# Altium PCB Phoenix ME MAX 22.5 SF G 2-2 KMGY.PcbDoc
Units mil, origin at the board's own origin, x right, y up, seen from the top; angles counter-clockwise.
Board outline 2881.89 x 2169.29 mil, 2 copper layers (Top Layer, Bottom Layer); 10 components, 0 nets, 42 pads, 0 vias.
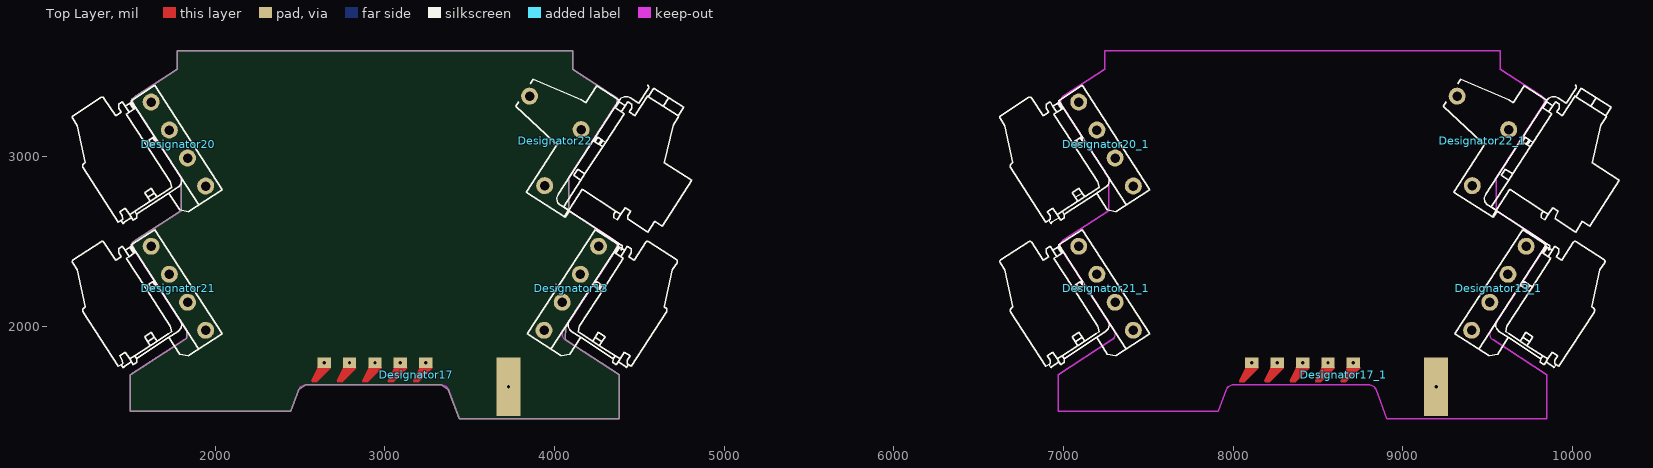
[diagram p0: Top Layer view]
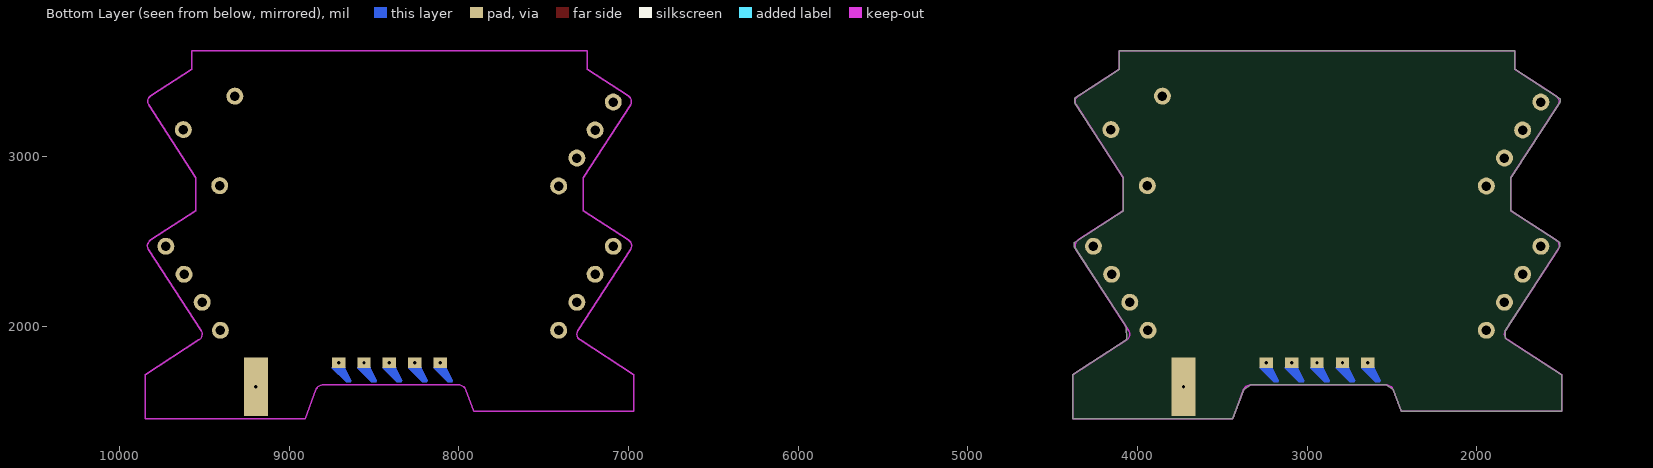
[diagram p1: Bottom Layer view, seen from below]

## Layer stack, top to bottom
Top Layer: signal copper 1.4
Dielectric: dielectric 12.6, FR-4, Dk 4.8
Bottom Layer: signal copper 1.4

## Board outline
2534.62,1655.51 2491.54,1626.77 2445.28,1500 1500,1500 1500,1714.49 1830.71,1929.13 1831.34,1974.41 1511.81,2468.5 1511.81,2496.06 1798.64,2681.98 1799.1,2875.91 1507.87,3322.83 1507.87,3342.52 1775.48,3515.91 1775.59,3625.98 4106.3,3625.98 4106.41,3515.91 4370.08,3345.07 4370.08,3316.79 4082.79,2875.91 4083.25,2681.98 4372.05,2495.08 4372.06,2469.51 4064.85,1997.3 4064.8,1920.38 4381.84,1714.49 4381.89,1456.69 3438.98,1456.69 3374.86,1626.86 3331.79,1655.51

## Design rules (kind name [scope] priority, off if disabled: settings)
Clearance [All] p1: gap=10
PolygonConnect [All] p1: connectstyle=Relief reliefconductorwidth=10 reliefentries=4 polygonreliefangle="90 Angle"
RoutingVias [All] p1: holewidth=28 width=50 viastyle="Through Hole" minholewidth=28 minwidth=50 maxholewidth=28 maxwidth=50
SilkscreenOverComponentPads [All] p1: minsilkscreentomaskgap=10
SolderMaskExpansion [All] p1: expansion=4
Width [All] p1: maxlimit=100 minlimit=6 preferedwidth=10
27 further rules are at their usual default settings.

## Components (designator, comment, footprint, x,y, rotation, side; value= is the part's Value field where it differs from the comment)
Designator13 "Comment" "MKDSO 2.5/4-R" 4099.02,2224.8 r327 top locked
Designator13_1 "Comment" "MKDSO 2.5/4-R" 9567.53,2224.8 r327 top locked
Designator17 "Comment" "ME22.5 TBUS1.5/5" 2941.71,1655.51 r0 top locked
Designator17_1 "Comment" "ME22.5 TBUS1.5/5" 8410.21,1655.51 r0 top locked
Designator20 "Comment" "MKDSO 2.5/4-L" 1782.87,3075.2 r33 top locked
Designator20_1 "Comment" "MKDSO 2.5/4-L" 7251.37,3075.2 r33 top locked
Designator21 "Comment" "MKDSO 2.5/4-L" 1782.87,2224.8 r33 top locked
Designator21_1 "Comment" "MKDSO 2.5/4-L" 7251.37,2224.8 r33 top locked
Designator22 "Comment" "MKDSO2.5 HV/3R-7.5" 4156.69,3159.84 r327 top locked
Designator22_1 "Comment" "MKDSO2.5 HV/3R-7.5" 9625.2,3159.84 r327 top locked

## Footprints (in the part's own frame and the unit in brackets; to place one, negate y for a bottom-side part, rotate by r counter-clockwise, add the part's x,y. Pads: shape width x height; smd on the part's side, far side on the other; paste and mask are expansions set on the pad)
"ME22.5 TBUS1.5/5" [mm]
  rect 2x1.6 hole 0.5: 1(-7.62,3.3) 2(-3.81,3.3) 3(0,3.3) 4(3.8,3.3) 5(7.6,3.3)
  rect 3.6x8.8 hole 0.5: 6(20,-0.3)
  Top Layer region: 1,2.6 1,2.5 -1.1,0.4 -1.8,0.4 -1.9,0.6 -1,2.5 -1,2.6
  Top Layer region: 4.8,2.6 4.8,2.5 2.7,0.4 2,0.4 1.9,0.6 2.8,2.5 2.8,2.6
  Top Layer region: 8.6,2.6 8.6,2.5 6.5,0.4 5.8,0.4 5.7,0.6 6.6,2.5 6.6,2.6
  Top Layer region: -2.81,2.6 -2.81,2.5 -4.91,0.4 -5.61,0.4 -5.71,0.6 -4.81,2.5 -4.81,2.6
  Top Layer region: -6.62,2.6 -6.62,2.5 -8.72,0.4 -9.42,0.4 -9.52,0.6 -8.62,2.5 -8.62,2.6
  Bottom Layer region: 1,2.6 1,2.5 -1.1,0.4 -1.8,0.4 -1.9,0.6 -1,2.5 -1,2.6
  Bottom Layer region: 4.8,2.6 4.8,2.5 2.7,0.4 2,0.4 1.9,0.6 2.8,2.5 2.8,2.6
  Bottom Layer region: 8.6,2.6 8.6,2.5 6.5,0.4 5.8,0.4 5.7,0.6 6.6,2.5 6.6,2.6
  Bottom Layer region: -2.81,2.6 -2.81,2.5 -4.91,0.4 -5.61,0.4 -5.71,0.6 -4.81,2.5 -4.81,2.6
  Bottom Layer region: -6.62,2.6 -6.62,2.5 -8.72,0.4 -9.42,0.4 -9.52,0.6 -8.62,2.5 -8.62,2.6
  Keep-Out Layer lines w0.2: -23,-3.95 -12.619,-3.95 -11.447,-0.729 ; -11.444,-0.73 cw(c-10.34,-1.2) -10.34,0 9.898,0 ; 9.898,0.002 cw(c9.898,-1.198) 11.002,-0.728 12.6,-5.05 23,-5.05
"MKDSO2.5 HV/3R-7.5" [mil]
  round 100 hole 56: 1(0,0) 2(-362.2,0) 3(-0.04,-393.74)
  silkscreen extent -398,-484 711,439
"MKDSO 2.5/4-L" [mil]
  round 100 hole 56: 1(0,98.43) 2(0,-98.43) 3(0,295.28) 4(0,-295.28)
  silkscreen extent -547,-366 71,478
"MKDSO 2.5/4-R" [mil]
  round 100 hole 56: 1(0,98.43) 2(0,295.28) 3(0,-98.43) 4(0,-295.28)
  silkscreen extent -71,-366 547,478

## Nets (pads, with @x,y where several pads share a name; then routed paths per layer and width w, separated by ;. In a path a pad name is that pad's centre, name@x,y a point inside that pad or via, vN(x,y) a via of type N, cw(c..) or ccw(c..) an arc to the next point about the centre after c; other vN are vias at no path point)
pads on no net: Designator13.1 Designator13.2 Designator13.3 Designator13.4 Designator13_1.1 Designator13_1.2 Designator13_1.3 Designator13_1.4 Designator17.1 Designator17.2 Designator17.3 Designator17.4 Designator17.5 Designator17.6 Designator17_1.1 Designator17_1.2 Designator17_1.3 Designator17_1.4 Designator17_1.5 Designator17_1.6 Designator20.1 Designator20.2 Designator20.3 Designator20.4 Designator20_1.1 Designator20_1.2 Designator20_1.3 Designator20_1.4 Designator21.1 Designator21.2 Designator21.3 Designator21.4 Designator21_1.1 Designator21_1.2 Designator21_1.3 Designator21_1.4 Designator22.1 Designator22.2 Designator22.3 Designator22_1.1 Designator22_1.2 Designator22_1.3

## Keep-outs
Keep-Out Layer:
  lines w7.87: 1500,1714.49 1500,1500 2444.88,1500 ; 1500.05,1714.49 1817.09,1920.38 ; 1519,2455.95 cw(c1553.1,2475.64) 1533.41,2509.74 1798.64,2681.98 ; 1519.13,2456.04 1831.74,1974.67 ; 1775.48,3515.91 1534.46,3359.39 ccw(c1554.13,3325.32) 1520.03,3305.63 1799.1,2875.91 1799.1,2681.22 ; 1775.59,3515.91 1775.59,3625.98 4106.3,3625.98 ; 1816.93,1920.63 ccw(c1797.24,1954.72) 1831.34,1974.41 ; 2445.28,1500 2491.43,1626.81 ; 2491.54,1626.77 cw(c2535.01,1608.27) 2535.01,1655.51 3331.79,1655.51 ; 3331.79,1655.6 cw(c3331.79,1608.36) 3375.26,1626.86 3438.16,1456.69 ; 3438.98,1456.69 4381.89,1456.69 4381.89,1714.57 ; 4050.15,1974.67 4362.76,2456.04 ; 4050.55,1974.41 ccw(c4084.65,1954.72) 4064.96,1920.63 ; 4064.8,1920.38 4381.84,1714.49 ; 4082.79,2681.22 4082.79,2875.91 4361.86,3305.63 ccw(c4327.76,3325.32) 4347.45,3359.41 4106.41,3515.91 ; 4083.25,2681.98 4348.48,2509.74 cw(c4328.79,2475.64) 4362.89,2455.95 ; 4106.3,3515.91 4106.3,3625.98 ; 6968.5,1714.49 6968.5,1500 7913.39,1500 ; 6968.56,1714.49 7285.6,1920.38 ; 6987.51,2455.95 cw(c7021.6,2475.64) 7001.92,2509.74 7267.15,2681.98 ; 6987.64,2456.04 7300.24,1974.67 ; 7243.99,3515.91 7002.96,3359.39 ccw(c7022.63,3325.32) 6988.54,3305.63 7267.6,2875.91 7267.6,2681.22 ; 7244.1,3515.91 7244.1,3625.98 9574.8,3625.98 ; 7285.43,1920.63 ccw(c7265.75,1954.72) 7299.84,1974.41 ; 7913.78,1500 7959.94,1626.81 ; 7960.05,1626.77 cw(c8003.52,1608.27) 8003.52,1655.51 8800.29,1655.51 ; 8800.29,1655.6 cw(c8800.29,1608.36) 8843.76,1626.86 8906.67,1456.69 ; 8907.48,1456.69 9850.39,1456.69 9850.39,1714.57 ; 9518.66,1974.67 9831.26,2456.04 ; 9519.06,1974.41 ccw(c9553.15,1954.72) 9533.47,1920.63 ; 9533.3,1920.38 9850.34,1714.49 ; 9551.3,2681.22 9551.3,2875.91 9830.36,3305.63 ccw(c9796.27,3325.32) 9815.95,3359.41 9574.91,3515.91 ; 9551.75,2681.98 9816.98,2509.74 cw(c9797.3,2475.64) 9831.39,2455.95 ; 9574.8,3515.91 9574.8,3625.98 ; 4106.3,3625.98 4106.3,3625.98 ; 9574.8,3625.98 9574.8,3625.98

## Silkscreen, mask and mechanical layers (free items; w line width, h text height)
Mechanical 15:
  drawing of 3196 lines, arcs and shapes, not listed

## Dimensions
7244.1,3645.67 to 9574.8,3645.67 on Mechanical 1
7090.55,2377.95 to 9728.35,2240.16 on Mechanical 1
6968.5,3393.7 to 9850.39,3645.67 on Mechanical 1
6950.79,3336.61 to 7224.41,3625.98 on Mechanical 1
6952.76,1501.97 to 6830.71,3625.98 on Mechanical 1
6954.73,2488.19 to 6948.82,3625.98 on Mechanical 1
6948.82,1714.57 to 6948.82,3625.98 on Mechanical 1
7230.99,2677.17 to 6937.03,2483.98 on Mechanical 1
7025.59,2470.47 to 9586.61,3625.98 on Mechanical 1
7014.96,3320.87 to 9586.61,3625.98 on Mechanical 1
8907.48,1429.13 to 9850.39,1429.92 on Mechanical 1
9870.08,1456.69 to 9586.61,3625.98 on Mechanical 1
6968.5,1488.19 to 9850.39,1440.94 on Mechanical 1
7267.72,2901.57 to 9551.18,2905.51 on Mechanical 1
6968.5,1484.25 to 7913.39,1480.32 on Mechanical 1
1775.59,3645.67 to 4106.3,3645.67 on Mechanical 1
1622.05,2377.95 to 4259.84,2240.16 on Mechanical 1
1500,3393.7 to 4381.89,3645.67 on Mechanical 1
1482.28,3336.61 to 1755.9,3625.98 on Mechanical 1
1484.25,1501.97 to 1362.2,3625.98 on Mechanical 1
1486.22,2488.19 to 1480.31,3625.98 on Mechanical 1
1480.32,1714.57 to 1480.31,3625.98 on Mechanical 1
1762.48,2677.17 to 1468.52,2483.98 on Mechanical 1
1557.09,2470.47 to 4118.11,3625.98 on Mechanical 1
1546.46,3320.87 to 4118.11,3625.98 on Mechanical 1
3438.98,1429.13 to 4381.89,1429.92 on Mechanical 1
4401.57,1456.69 to 4118.11,3625.98 on Mechanical 1
1500,1488.19 to 4381.89,1440.94 on Mechanical 1
1799.21,2901.57 to 4082.68,2905.51 on Mechanical 1
1500,1484.25 to 2444.88,1480.32 on Mechanical 1